# EAGLE board CT_schematic (EAGLE 7.6.0)

Size 100 x 80 mm. Coordinates in mm from the lower left corner, seen from the top.
Outline: 0,0 100,0 100,80 0,80 0,0
Copper layers (1*16): Top 0.035mm / dielectric 1.5mm / Bottom 0.035mm
Design rules "default": minimum track width 10mil, minimum drill 24mil, track to track 8mil, track to pad 8mil, pad to pad 8mil, via to via 8mil, smd to smd 8mil, copper to edge 40mil, drill to drill 8mil, minimum pad ring 10mil, minimum via ring 8mil, stop-mask expansion 4mil, vias tented up to drill 0mil, thermal gap 10mil

## Footprints (pad centres in the part's own frame; a part is rotated, then mirrored left to right if it is on the bottom)
C0603 = smd 0.8 x 0.8: 1 -0.762,0; 2 0.762,0
C0402 = smd 0.5 x 0.5: 1 -0.508,0; 2 0.508,0
C1210 = smd 1.2 x 2.5: 1 -1.524,0; 2 1.524,0
EXV-9H = smd 3.505 x 1.676: 1 -2.857,0; 2 2.857,0
L0603 = smd 0.8 x 0.8: 1 -0.762,0; 2 0.762,0
PJ-037B_PACKAGE = drill 3.7 square: 1 12,0 | drill 3.2 square: 2 6,0
R0603 = smd 0.8 x 0.8: 1 -0.762,0; 2 0.762,0
UFQFPN32 = smd 0.6 x 0.3: 1 -2.35,1.75; 2 -2.35,1.25; 3 -2.35,0.75; 4 -2.35,0.25; 5 -2.35,-0.25; 6 -2.35,-0.75; 7 -2.35,-1.25; 8 -2.35,-1.75; 17 2.35,-1.75; 18 2.35,-1.25; 19 2.35,-0.75; 20 2.35,-0.25; 21 2.35,0.25; 22 2.35,0.75; 23 2.35,1.25; 24 2.35,1.75 | smd 0.3 x 0.6: 9 -1.75,-2.35; 10 -1.25,-2.35; 11 -0.75,-2.35; 12 -0.25,-2.35; 13 0.25,-2.35; 14 0.75,-2.35; 15 1.25,-2.35; 16 1.75,-2.35; 25 1.75,2.35; 26 1.25,2.35; 27 0.75,2.35; 28 0.25,2.35; 29 -0.25,2.35; 30 -0.75,2.35; 31 -1.25,2.35; 32 -1.75,2.35 | smd 3.45 x 3.45: EPAD 0,0
MICRO_USB_AB = smd 0.4 x 1.35: 1 1.3,0.26; 2 0.65,0.26; 3 0,0.26; 4 -0.65,0.26; 5 -1.3,0.26 | drill 0.6 pad 0.95 long: 6 4.175,-2.54; 7 -4.175,-2.54 | drill 0.7 pad 1.1 long: 8 -2.225,0.46; 9 2.225,0.46
SOT143B = smd 1 x 0.7: 1 -0.75,-1 | smd 0.6 x 0.7: 2 0.95,-1; 3 0.95,1; 4 -0.95,1
ASEK = smd 1.4 x 1: 1 -1.1,-0.8; 2 1.1,-0.8; 3 1.1,0.8; 4 -1.1,0.8
SOIC-8_EP = smd 1.6 x 0.533: 1 -2.921,1.905; 2 -2.921,0.635; 3 -2.921,-0.635; 4 -2.921,-1.905; 5 2.921,-1.905; 6 2.921,-0.635; 7 2.921,0.635; 8 2.921,1.905 | smd 2.54 x 3.302: EPAD 0,0 | drill 0.406 pad 0.406: P$1 -0.508,0.635; P$2 0.381,0.635; P$3 -0.508,-0.635; P$4 0.381,-0.635
SON-6 = smd 0.55 x 0.3: 1 -0.355,0.5 | smd 0.52 x 0.3: 2 -0.37,0; 3 -0.37,-0.5; 4 0.37,-0.5; 5 0.37,0; 6 0.37,0.5
SW_4-1437565-2 = smd 1.4 x 2.1: 1 -2.23,4.55; 2 -2.23,-4.55; 3 2.23,4.55; 4 2.23,-4.55
LGM67K-G1J2-24-Z = smd 0.8 x 1.4: A -2,0; C 0,0
NC7SZ125M5X = smd 1.3 x 0.7: 1 -1.3,0.95; 2 -1.3,0; 3 -1.3,-0.95; 4 1.3,-0.95; 5 1.3,0.95
DUMMY_PACKAGE_82 = drill 0.3: 1 0,-1; 2 1.5,-1; 3 3,-1

## Placement (x,y rotation side)
C1  1e-07  [C0603]  -27.94,49.53 0 top  (outside the outline)
C2  1e-07  [C0603]  -31.75,49.53 0 top  (outside the outline)
C3  1e-07  [C0603]  -35.56,49.53 0 top  (outside the outline)
C4  1e-07  [C0603]  -39.37,49.53 0 top  (outside the outline)
C5  4.7e-06  [C0603]  -24.13,49.53 0 top  (outside the outline)
C6  1e-08  [C0603]  -43.18,49.53 0 top  (outside the outline)
C7  1e-06  [C0603]  -46.99,49.53 0 top  (outside the outline)
C8  1e-07  [C0603]  -50.8,49.53 0 top  (outside the outline)
C9  1e-08  [C0402]  -34.29,54.61 0 top  (outside the outline)
C10  1e-05  [C1210]  -38.1,38.1 0 top  (outside the outline)
C11  1e-05  [C1210]  -44.45,38.1 0 top  (outside the outline)
C12  1e-05  [C1210]  -50.8,38.1 0 top  (outside the outline)
C13  1e-05  [C1210]  -16.51,44.45 0 top  (outside the outline)
C14  1e-07  [C0402]  -38.1,54.61 0 top  (outside the outline)
C15  0.0001  [EXV-9H]  -38.1,30.48 0 top  (outside the outline)
C16  0.0001  [EXV-9H]  -49.53,30.48 0 top  (outside the outline)
C17  1e-08  [C0402]  -41.91,54.61 0 top  (outside the outline)
F1  240.0  [L0603]  -54.61,49.53 0 top  (outside the outline)
J1  PJ-037B  [PJ-037B_PACKAGE]  -27.94,7.62 0 top  (outside the outline)
R1  10000.0  [R0603]  -46.99,44.45 0 top  (outside the outline)
R2  1000.0  [R0603]  -15.24,54.61 0 top  (outside the outline)
R3  1600.5  [R0603]  -19.05,54.61 0 top  (outside the outline)
R4  4700.0  [R0603]  -22.86,54.61 0 top  (outside the outline)
R5  10000.0  [R0603]  -52.07,44.45 0 top  (outside the outline)
R6  4031.5447154472  [R0603]  -31.75,44.45 0 top  (outside the outline)
R7  2200.0  [R0603]  -26.67,54.61 0 top  (outside the outline)
R8  10000.0  [R0603]  -15.24,49.53 0 top  (outside the outline)
R9  10000.0  [R0603]  -20.32,49.53 0 top  (outside the outline)
R10  9100.0  [R0603]  -30.48,54.61 0 top  (outside the outline)
R11  680000.0  [R0603]  -36.83,44.45 0 top  (outside the outline)
R12  120000.0  [R0603]  -41.91,44.45 0 top  (outside the outline)
U1  STM32L082KZU6  [UFQFPN32]  -44.45,19.05 0 top  (outside the outline)
U2  47590-0001  [MICRO_USB_AB]  -36.83,7.62 0 top  (outside the outline)
U3  prtr5v0u2ax  [SOT143B]  -54.61,54.61 0 top  (outside the outline)
U4  ASEK-32.768KHz-ECST  [ASEK]  -29.21,30.48 0 top  (outside the outline)
U5  MIC5234YME  [SOIC-8_EP]  -17.78,36.83 0 top  (outside the outline)
U6  TPS3895ADRYR  [SON-6]  -20.32,58.42 0 top  (outside the outline)
U7  4-1437565-2  [SW_4-1437565-2]  -27.94,20.32 0 top  (outside the outline)
U8  Q65110A2395  [LGM67K-G1J2-24-Z]  -26.67,38.1 0 top  (outside the outline)
U9  nc7sz125m5x  [NC7SZ125M5X]  -21.59,43.18 0 top  (outside the outline)
U10  Dummy  [DUMMY_PACKAGE_82]  -17.78,59.69 0 top  (outside the outline)

## Library data of the parts
C1-C17 F1 J1 R1-R12 U1-U10 = circuit_tree

## Nets
CLK_U1_1: U1.1 U4.3
GND: C1.2 C2.2 C3.2 C4.2 C5.2 C6.2 C7.2 C8.2 C9.2 C10.2 C11.2 C12.2 C13.2 C14.2 C15.2 C16.2 C17.2 J1.2 R2.2 R5.2 R7.2 R10.2 R12.2 U1.4 U1.16 U1.31 U1.EPAD U2.5 U2.6 U2.7 U2.8 U2.9 U3.1 U4.2 U5.7 U5.EPAD U6.2 U8.C U9.1 U9.3 U10.1
NET_U1_3: R4.1 U1.3 U9.4
NET_U1_5: C6.1 C7.1 F1.1 U1.5
NET_U1_28: R3.1 U1.28 U8.A
NET_U1_29: R1.1 U1.29 U7.3 U7.4
NET_U1_30: R5.1 U1.30
NET_U3_4: U2.1 U3.4
NET_U5_4: R6.2 R7.1 U5.4
NET_U6_1: R9.1 R10.1 U6.1
NET_U6_3: R11.2 R12.1 U6.3
NET_U6_4: R8.1 U6.4 U9.2
NET_U7_1: R2.1 U7.1 U7.2
PROC_TIM2_CH1: U1.6 U10.3
PROC_TIM2_CH3: U1.8 U10.2
PROC_USB_DM: U1.21 U2.2 U3.3
PROC_USB_DP: U1.22 U2.3 U3.2
VCC_S1_5V7: C10.1 C11.1 C15.1 C16.1 J1.1 U5.5 U5.8
VCC_TIER1_3V3: C1.1 C2.1 C3.1 C4.1 C5.1 C8.1 C9.1 C12.1 C13.1 C14.1 C17.1 F1.2 R1.2 R3.2 R4.2 R6.1 R8.2 R9.2 R11.1 U1.17 U1.24 U1.32 U4.4 U5.1 U6.6 U9.5

## Tracks (layer width: path | path; a pad name or v marks a point on that pad's centre or on a via)
CLK_U1_1  (1 unrouted)
GND  (40 unrouted)
NET_U1_3  (2 unrouted)
NET_U1_5  (3 unrouted)
NET_U1_28  (2 unrouted)
NET_U1_29  (3 unrouted)
NET_U1_30  (1 unrouted)
NET_U3_4  (1 unrouted)
NET_U5_4  (2 unrouted)
NET_U6_1  (2 unrouted)
NET_U6_3  (2 unrouted)
NET_U6_4  (2 unrouted)
NET_U7_1  (2 unrouted)
PROC_TIM2_CH1  (1 unrouted)
PROC_TIM2_CH3  (1 unrouted)
PROC_USB_DM  (2 unrouted)
PROC_USB_DP  (2 unrouted)
VCC_S1_5V7  (6 unrouted)
VCC_TIER1_3V3  (25 unrouted)